# Altium PCB INDICATOR RIGHT.PcbDoc
Units mil, origin at the board's own origin, x right, y up, seen from the top; angles counter-clockwise.
Board outline 6151.76 x 2529.72 mil, 2 copper layers (Top Layer, Bottom Layer); 118 components, 87 nets, 286 pads, 24 vias.
Unrouted connection lines stored in the file: 76.
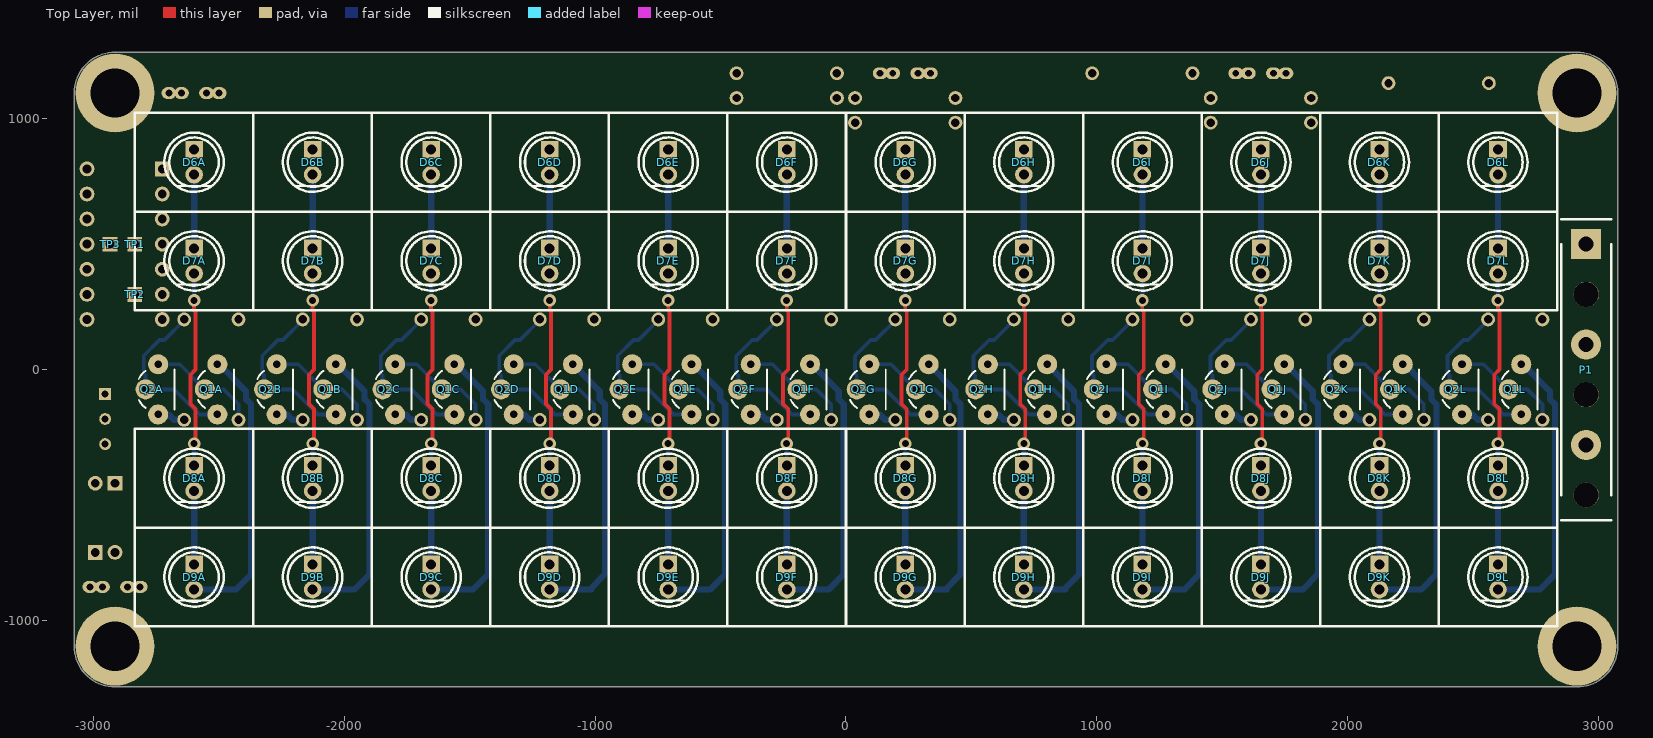
[diagram p0: Top Layer view]
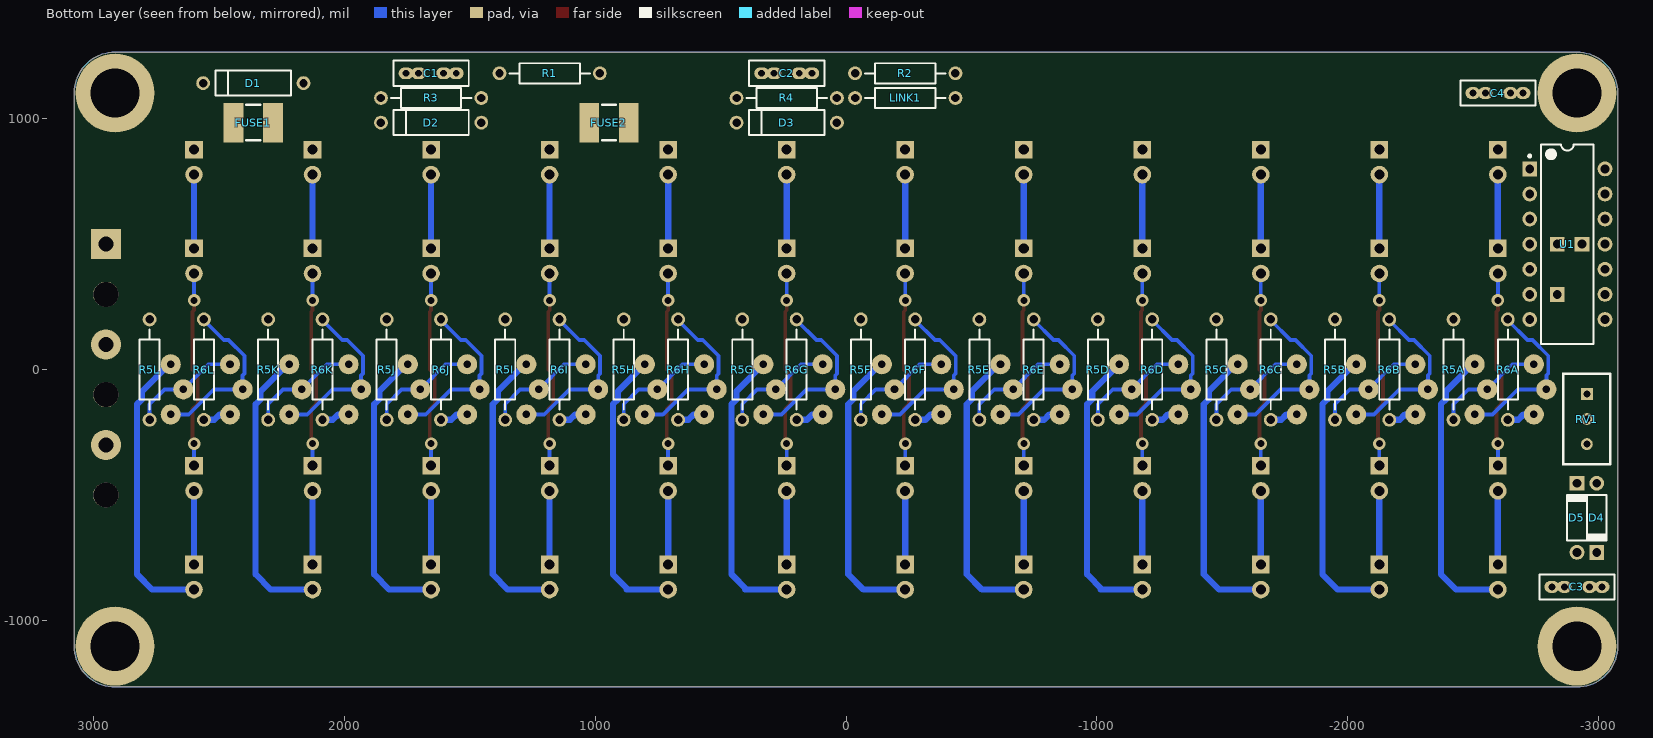
[diagram p1: Bottom Layer view, seen from below]
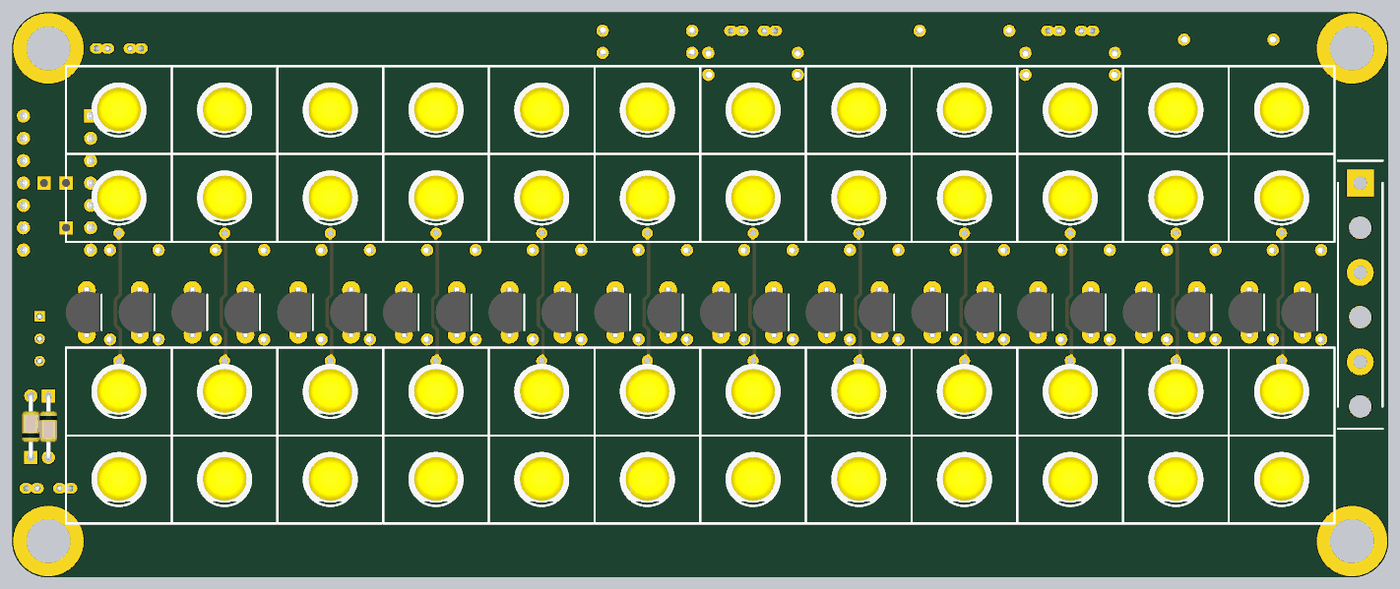
[diagram p2: 3D render of the assembled board from above, using the file's embedded part models]
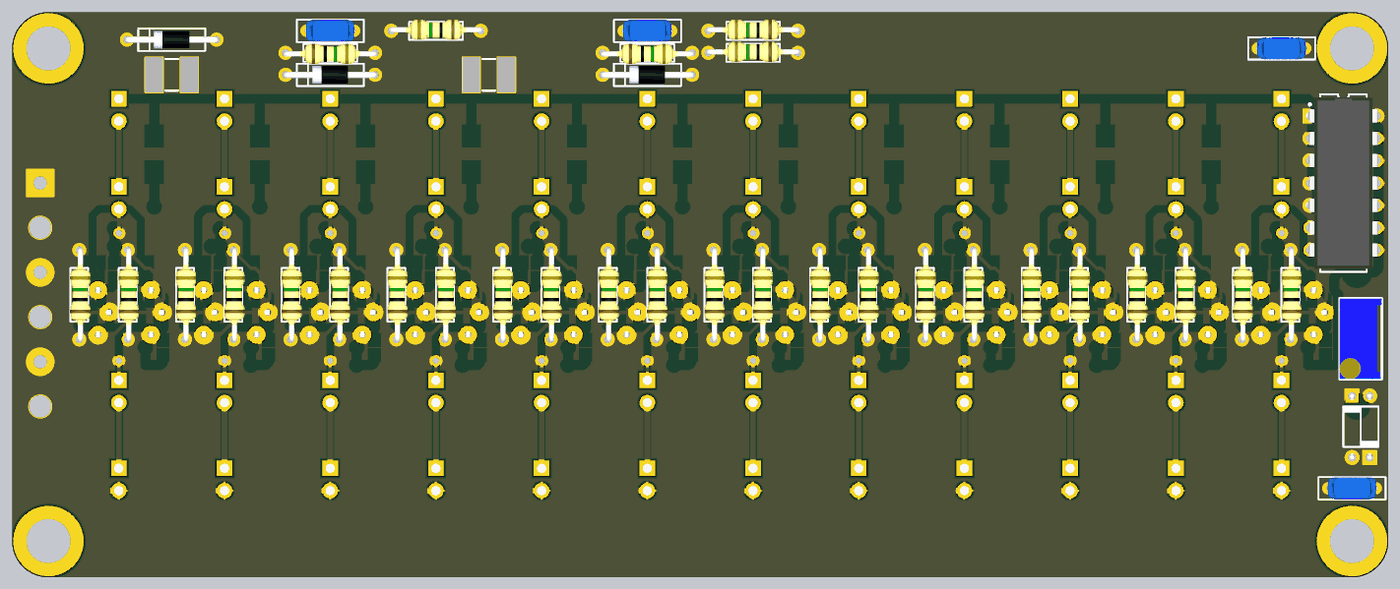
[diagram p3: 3D render of the assembled board from below, using the file's embedded part models]

## Layer stack, top to bottom
Top Layer: signal copper 1.4
Dielectric: dielectric 12.6, FR-4, Dk 4.8
Bottom Layer: signal copper 1.4

## Board outline
-3075.88,-1102.36 -3075.88,1102.36 cw(c-2913.39,1102.36) -2913.39,1264.86 2913.39,1264.86 cw(c2913.39,1102.36) 3075.88,1102.36 3075.88,-1102.36 cw(c2913.39,-1102.36) 2913.39,-1264.86 -2913.39,-1264.86 cw(c-2913.39,-1102.36)

## Design rules (kind name [scope] priority, off if disabled: settings)
Clearance [All] p1: gap=10
PolygonConnect [All] p1: connectstyle=Relief reliefconductorwidth=10 reliefentries=4 polygonreliefangle="90 Angle" airgapwidth=10
RoomDefinition INDICATOR [InComponentClass('INDICATOR')] p1: confinementstyle=ConfineIn formatcopy=TRUE lockcomponents=FALSE outline -3070.87,-1259.84 3070.87,-1259.84 3070.87,1259.84 -3070.87,1259.84
RoomDefinition U_LEDSANDDRIVER12 [InComponentClass('U_LEDSANDDRIVER12')] p2: confinementstyle=ConfineIn formatcopy=TRUE lockcomponents=FALSE outline 2362.2,-1023.62 2834.65,-1023.62 2834.65,1023.62 2362.2,1023.62
RoomDefinition U_LEDSANDDRIVER11 [InComponentClass('U_LEDSANDDRIVER11')] p3: confinementstyle=ConfineIn formatcopy=TRUE lockcomponents=FALSE outline 1889.76,-1023.62 2362.2,-1023.62 2362.2,1023.62 1889.76,1023.62
RoomDefinition U_LEDSANDDRIVER10 [InComponentClass('U_LEDSANDDRIVER10')] p4: confinementstyle=ConfineIn formatcopy=TRUE lockcomponents=FALSE outline 1417.32,-1023.62 1889.76,-1023.62 1889.76,1023.62 1417.32,1023.62
RoomDefinition U_LEDSANDDRIVER9 [InComponentClass('U_LEDSANDDRIVER9')] p5: confinementstyle=ConfineIn formatcopy=TRUE lockcomponents=FALSE outline 944.88,-1023.62 1417.32,-1023.62 1417.32,1023.62 944.88,1023.62
RoomDefinition U_LEDSANDDRIVER8 [InComponentClass('U_LEDSANDDRIVER8')] p6: confinementstyle=ConfineIn formatcopy=TRUE lockcomponents=FALSE outline 472.44,-1023.62 944.88,-1023.62 944.88,1023.62 472.44,1023.62
RoomDefinition U_LEDSANDDRIVER7 [InComponentClass('U_LEDSANDDRIVER7')] p7: confinementstyle=ConfineIn formatcopy=TRUE lockcomponents=FALSE outline 0,-1023.62 472.44,-1023.62 472.44,1023.62 0,1023.62
RoomDefinition U_LEDSANDDRIVER6 [InComponentClass('U_LEDSANDDRIVER6')] p8: confinementstyle=ConfineIn formatcopy=TRUE lockcomponents=FALSE outline -472.44,-1023.62 0,-1023.62 0,1023.62 -472.44,1023.62
RoomDefinition U_LEDSANDDRIVER5 [InComponentClass('U_LEDSANDDRIVER5')] p9: confinementstyle=ConfineIn formatcopy=TRUE lockcomponents=FALSE outline -944.88,-1023.62 -472.44,-1023.62 -472.44,1023.62 -944.88,1023.62
RoomDefinition U_LEDSANDDRIVER4 [InComponentClass('U_LEDSANDDRIVER4')] p10: confinementstyle=ConfineIn formatcopy=TRUE lockcomponents=FALSE outline -1417.32,-1023.62 -944.88,-1023.62 -944.88,1023.62 -1417.32,1023.62
RoomDefinition U_LEDSANDDRIVER3 [InComponentClass('U_LEDSANDDRIVER3')] p11: confinementstyle=ConfineIn formatcopy=TRUE lockcomponents=FALSE outline -1889.76,-1023.62 -1417.32,-1023.62 -1417.32,1023.62 -1889.76,1023.62
RoomDefinition U_LEDSANDDRIVER2 [InComponentClass('U_LEDSANDDRIVER2')] p12: confinementstyle=ConfineIn formatcopy=TRUE lockcomponents=FALSE outline -2362.2,-1023.62 -1889.76,-1023.62 -1889.76,1023.62 -2362.2,1023.62
RoomDefinition U_LEDSANDDRIVER1 [InComponentClass('U_LEDSANDDRIVER1')] p13: confinementstyle=ConfineIn formatcopy=TRUE lockcomponents=FALSE outline -2834.65,-1023.62 -2362.2,-1023.62 -2362.2,1023.62 -2834.65,1023.62
RoutingVias [All] p1: holewidth=28 width=50 viastyle="Through Hole" minholewidth=28 minwidth=50 maxholewidth=28 maxwidth=50
SolderMaskExpansion [All] p1: expansion=4
Width [All] p1: maxlimit=100 minlimit=10 preferedwidth=10
28 further rules are at their usual default settings.

## Classes and differential pairs
component class INDICATOR: C1 C2 C3 C4 D1 D2 D3 D4 D5 FUSE1 FUSE2 LINK1 P1 R1 R2 R3 R4 RV1 TP1 TP2 TP3 U1
component class U_LEDSANDDRIVER1: D6A D7A D8A D9A Q1A Q2A R5A R6A
component class U_LEDSANDDRIVER2: D6B D7B D8B D9B Q1B Q2B R5B R6B
component class U_LEDSANDDRIVER3: D6C D7C D8C D9C Q1C Q2C R5C R6C
component class U_LEDSANDDRIVER4: D6D D7D D8D D9D Q1D Q2D R5D R6D
component class U_LEDSANDDRIVER5: D6E D7E D8E D9E Q1E Q2E R5E R6E
component class U_LEDSANDDRIVER6: D6F D7F D8F D9F Q1F Q2F R5F R6F
component class U_LEDSANDDRIVER7: D6G D7G D8G D9G Q1G Q2G R5G R6G
component class U_LEDSANDDRIVER8: D6H D7H D8H D9H Q1H Q2H R5H R6H
component class U_LEDSANDDRIVER9: D6I D7I D8I D9I Q1I Q2I R5I R6I
component class U_LEDSANDDRIVER10: D6J D7J D8J D9J Q1J Q2J R5J R6J
component class U_LEDSANDDRIVER11: D6K D7K D8K D9K Q1K Q2K R5K R6K
component class U_LEDSANDDRIVER12: D6L D7L D8L D9L Q1L Q2L R5L R6L
channel class "LEDS AND DRIVER": U_LEDSANDDRIVER1 U_LEDSANDDRIVER2 U_LEDSANDDRIVER3 U_LEDSANDDRIVER4 U_LEDSANDDRIVER5 U_LEDSANDDRIVER6 U_LEDSANDDRIVER7 U_LEDSANDDRIVER8 U_LEDSANDDRIVER9 U_LEDSANDDRIVER10 U_LEDSANDDRIVER11 U_LEDSANDDRIVER12

## Components (designator, comment, footprint, x,y, rotation, side; value= is the part's Value field where it differs from the comment)
C1 "100nF" RAD-0.2-0.3 1653.54,1181.1 r0 bottom
C2 "100nF" RAD-0.2-0.3 236.22,1181.1 r0 bottom
C3 "100nF" RAD-0.2-0.3 -2913.39,-866.14 r180 bottom
C4 "100nF" RAD-0.2-0.3 -2598.43,1102.36 r180 bottom
D1 "1N4001" 1N4001 2362.2,1141.73 r180 bottom
D2 "12V" 1N4001 1653.54,984.25 r180 bottom
D3 "12V" 1N4001 236.22,984.25 r180 bottom
D4 "1N914" DO-35A -2992.13,-590.55 r270 bottom
D5 "1N914" DO-35A -2913.39,-590.55 r90 bottom
D6A "Value" "LED(3D) 5MM VERTICAL (YELLOW)" -2598.43,826.77 r90 top (schematic designator D6)
D6B "Value" "LED(3D) 5MM VERTICAL (YELLOW)" -2125.98,826.77 r90 top (schematic designator D6)
D6C "Value" "LED(3D) 5MM VERTICAL (YELLOW)" -1653.54,826.77 r90 top (schematic designator D6)
D6D "Value" "LED(3D) 5MM VERTICAL (YELLOW)" -1181.1,826.77 r90 top (schematic designator D6)
D6E "Value" "LED(3D) 5MM VERTICAL (YELLOW)" -708.66,826.77 r90 top (schematic designator D6)
D6F "Value" "LED(3D) 5MM VERTICAL (YELLOW)" -236.22,826.77 r90 top (schematic designator D6)
D6G "Value" "LED(3D) 5MM VERTICAL (YELLOW)" 236.22,826.77 r90 top (schematic designator D6)
D6H "Value" "LED(3D) 5MM VERTICAL (YELLOW)" 708.66,826.77 r90 top (schematic designator D6)
D6I "Value" "LED(3D) 5MM VERTICAL (YELLOW)" 1181.1,826.77 r90 top (schematic designator D6)
D6J "Value" "LED(3D) 5MM VERTICAL (YELLOW)" 1653.54,826.77 r90 top (schematic designator D6)
D6K "Value" "LED(3D) 5MM VERTICAL (YELLOW)" 2125.98,826.77 r90 top (schematic designator D6)
D6L "Value" "LED(3D) 5MM VERTICAL (YELLOW)" 2598.43,826.77 r90 top (schematic designator D6)
D7A "Value" "LED(3D) 5MM VERTICAL (YELLOW)" -2598.43,433.07 r90 top (schematic designator D7)
D7B "Value" "LED(3D) 5MM VERTICAL (YELLOW)" -2125.98,433.07 r90 top (schematic designator D7)
D7C "Value" "LED(3D) 5MM VERTICAL (YELLOW)" -1653.54,433.07 r90 top (schematic designator D7)
D7D "Value" "LED(3D) 5MM VERTICAL (YELLOW)" -1181.1,433.07 r90 top (schematic designator D7)
D7E "Value" "LED(3D) 5MM VERTICAL (YELLOW)" -708.66,433.07 r90 top (schematic designator D7)
D7F "Value" "LED(3D) 5MM VERTICAL (YELLOW)" -236.22,433.07 r90 top (schematic designator D7)
D7G "Value" "LED(3D) 5MM VERTICAL (YELLOW)" 236.22,433.07 r90 top (schematic designator D7)
D7H "Value" "LED(3D) 5MM VERTICAL (YELLOW)" 708.66,433.07 r90 top (schematic designator D7)
D7I "Value" "LED(3D) 5MM VERTICAL (YELLOW)" 1181.1,433.07 r90 top (schematic designator D7)
D7J "Value" "LED(3D) 5MM VERTICAL (YELLOW)" 1653.54,433.07 r90 top (schematic designator D7)
D7K "Value" "LED(3D) 5MM VERTICAL (YELLOW)" 2125.98,433.07 r90 top (schematic designator D7)
D7L "Value" "LED(3D) 5MM VERTICAL (YELLOW)" 2598.43,433.07 r90 top (schematic designator D7)
D8A "Value" "LED(3D) 5MM VERTICAL (YELLOW)" -2598.43,-433.07 r90 top (schematic designator D8)
D8B "Value" "LED(3D) 5MM VERTICAL (YELLOW)" -2125.98,-433.07 r90 top (schematic designator D8)
D8C "Value" "LED(3D) 5MM VERTICAL (YELLOW)" -1653.54,-433.07 r90 top (schematic designator D8)
D8D "Value" "LED(3D) 5MM VERTICAL (YELLOW)" -1181.1,-433.07 r90 top (schematic designator D8)
D8E "Value" "LED(3D) 5MM VERTICAL (YELLOW)" -708.66,-433.07 r90 top (schematic designator D8)
D8F "Value" "LED(3D) 5MM VERTICAL (YELLOW)" -236.22,-433.07 r90 top (schematic designator D8)
D8G "Value" "LED(3D) 5MM VERTICAL (YELLOW)" 236.22,-433.07 r90 top (schematic designator D8)
D8H "Value" "LED(3D) 5MM VERTICAL (YELLOW)" 708.66,-433.07 r90 top (schematic designator D8)
D8I "Value" "LED(3D) 5MM VERTICAL (YELLOW)" 1181.1,-433.07 r90 top (schematic designator D8)
D8J "Value" "LED(3D) 5MM VERTICAL (YELLOW)" 1653.54,-433.07 r90 top (schematic designator D8)
D8K "Value" "LED(3D) 5MM VERTICAL (YELLOW)" 2125.98,-433.07 r90 top (schematic designator D8)
D8L "Value" "LED(3D) 5MM VERTICAL (YELLOW)" 2598.43,-433.07 r90 top (schematic designator D8)
D9A "Value" "LED(3D) 5MM VERTICAL (YELLOW)" -2598.43,-826.77 r90 top (schematic designator D9)
D9B "Value" "LED(3D) 5MM VERTICAL (YELLOW)" -2125.98,-826.77 r90 top (schematic designator D9)
D9C "Value" "LED(3D) 5MM VERTICAL (YELLOW)" -1653.54,-826.77 r90 top (schematic designator D9)
D9D "Value" "LED(3D) 5MM VERTICAL (YELLOW)" -1181.1,-826.77 r90 top (schematic designator D9)
D9E "Value" "LED(3D) 5MM VERTICAL (YELLOW)" -708.66,-826.77 r90 top (schematic designator D9)
D9F "Value" "LED(3D) 5MM VERTICAL (YELLOW)" -236.22,-826.77 r90 top (schematic designator D9)
D9G "Value" "LED(3D) 5MM VERTICAL (YELLOW)" 236.22,-826.77 r90 top (schematic designator D9)
D9H "Value" "LED(3D) 5MM VERTICAL (YELLOW)" 708.66,-826.77 r90 top (schematic designator D9)
D9I "Value" "LED(3D) 5MM VERTICAL (YELLOW)" 1181.1,-826.77 r90 top (schematic designator D9)
D9J "Value" "LED(3D) 5MM VERTICAL (YELLOW)" 1653.54,-826.77 r90 top (schematic designator D9)
D9K "Value" "LED(3D) 5MM VERTICAL (YELLOW)" 2125.98,-826.77 r90 top (schematic designator D9)
D9L "Value" "LED(3D) 5MM VERTICAL (YELLOW)" 2598.43,-826.77 r90 top (schematic designator D9)
FUSE1 "500mA" "miniSMD Polyswitch" 2362.2,984.25 r180 bottom
FUSE2 "500mA" "miniSMD Polyswitch" 944.88,984.25 r180 bottom
LINK1 "Res2" AXIAL-0.4 -236.22,1082.68 r0 bottom
P1 "Header 3" TAIL 3050,0 r270 top
Q1A "PN100" TO-92 -2500,-78.74 r0 top (schematic designator Q1)
Q1B "PN100" TO-92 -2027.55,-78.74 r0 top (schematic designator Q1)
Q1C "PN100" TO-92 -1555.11,-78.74 r0 top (schematic designator Q1)
Q1D "PN100" TO-92 -1082.67,-78.74 r0 top (schematic designator Q1)
Q1E "PN100" TO-92 -610.23,-78.74 r0 top (schematic designator Q1)
Q1F "PN100" TO-92 -137.79,-78.74 r0 top (schematic designator Q1)
Q1G "PN100" TO-92 334.65,-78.74 r0 top (schematic designator Q1)
Q1H "PN100" TO-92 807.09,-78.74 r0 top (schematic designator Q1)
Q1I "PN100" TO-92 1279.53,-78.74 r0 top (schematic designator Q1)
Q1J "PN100" TO-92 1751.97,-78.74 r0 top (schematic designator Q1)
Q1K "PN100" TO-92 2224.41,-78.74 r0 top (schematic designator Q1)
Q1L "PN100" TO-92 2696.85,-78.74 r0 top (schematic designator Q1)
Q2A "PN100" TO-92 -2736.22,-78.74 r0 top (schematic designator Q2)
Q2B "PN100" TO-92 -2263.78,-78.74 r0 top (schematic designator Q2)
Q2C "PN100" TO-92 -1791.33,-78.74 r0 top (schematic designator Q2)
Q2D "PN100" TO-92 -1318.89,-78.74 r0 top (schematic designator Q2)
Q2E "PN100" TO-92 -846.45,-78.74 r0 top (schematic designator Q2)
Q2F "PN100" TO-92 -374.01,-78.74 r0 top (schematic designator Q2)
Q2G "PN100" TO-92 98.43,-78.74 r0 top (schematic designator Q2)
Q2H "PN100" TO-92 570.87,-78.74 r0 top (schematic designator Q2)
Q2I "PN100" TO-92 1043.31,-78.74 r0 top (schematic designator Q2)
Q2J "PN100" TO-92 1515.75,-78.74 r0 top (schematic designator Q2)
Q2K "PN100" TO-92 1988.19,-78.74 r0 top (schematic designator Q2)
Q2L "PN100" TO-92 2460.63,-78.74 r0 top (schematic designator Q2)
R1 "Res2" AXIAL-0.4 1181.1,1181.1 r0 bottom
R2 "Res2" AXIAL-0.4 -236.22,1181.1 r0 bottom
R3 "Res2" AXIAL-0.4 1653.54,1082.68 r180 bottom
R4 "Res2" AXIAL-0.4 236.22,1082.68 r180 bottom
R5A "1k" AXIAL-0.4 -2421.26,0 r90 bottom (schematic designator R5)
R5B "1k" AXIAL-0.4 -1948.82,0 r90 bottom (schematic designator R5)
R5C "1k" AXIAL-0.4 -1476.38,0 r90 bottom (schematic designator R5)
R5D "1k" AXIAL-0.4 -1003.94,0 r90 bottom (schematic designator R5)
R5E "1k" AXIAL-0.4 -531.5,0 r90 bottom (schematic designator R5)
R5F "1k" AXIAL-0.4 -59.05,0 r90 bottom (schematic designator R5)
R5G "1k" AXIAL-0.4 413.39,0 r90 bottom (schematic designator R5)
R5H "1k" AXIAL-0.4 885.83,0 r90 bottom (schematic designator R5)
R5I "1k" AXIAL-0.4 1358.27,0 r90 bottom (schematic designator R5)
R5J "1k" AXIAL-0.4 1830.71,0 r90 bottom (schematic designator R5)
R5K "1k" AXIAL-0.4 2303.15,0 r90 bottom (schematic designator R5)
R5L "1k" AXIAL-0.4 2775.59,0 r90 bottom (schematic designator R5)
R6A "35R" AXIAL-0.4 -2637.8,0 r90 bottom (schematic designator R6)
R6B "35R" AXIAL-0.4 -2165.35,0 r90 bottom (schematic designator R6)
R6C "35R" AXIAL-0.4 -1692.91,0 r90 bottom (schematic designator R6)
R6D "35R" AXIAL-0.4 -1220.47,0 r90 bottom (schematic designator R6)
R6E "35R" AXIAL-0.4 -748.03,0 r90 bottom (schematic designator R6)
R6F "35R" AXIAL-0.4 -275.59,0 r90 bottom (schematic designator R6)
R6G "35R" AXIAL-0.4 196.85,0 r90 bottom (schematic designator R6)
R6H "35R" AXIAL-0.4 669.29,0 r90 bottom (schematic designator R6)
R6I "35R" AXIAL-0.4 1141.73,0 r90 bottom (schematic designator R6)
R6J "35R" AXIAL-0.4 1614.17,0 r90 bottom (schematic designator R6)
R6K "35R" AXIAL-0.4 2086.61,0 r90 bottom (schematic designator R6)
R6L "35R" AXIAL-0.4 2559.06,0 r90 bottom (schematic designator R6)
RV1 "10k" "TRIMPOT (10 TURN)" -2952.76,-196.85 r270 bottom
TP1 "TestPoint" TP_TH -2834.65,500 r0 top
TP2 "TestPoint" TP_TH -2834.65,300 r90 top
TP3 "TestPoint" TP_TH -2933.07,500 r90 top
U1 "CD4011" DIP-14 -2875,500 r180 bottom

## Footprints (in the part's own frame and the unit in brackets; to place one, negate y for a bottom-side part, rotate by r counter-clockwise, add the part's x,y. Pads: shape width x height; smd on the part's side, far side on the other; paste and mask are expansions set on the pad)
1N4001 [mm] "Axial Device, Thru-Hole; 2 Leads; 0.5 in Pin Spacing"
  round 1.4 hole 0.85: 1(5.08,0) 2(-5.08,0)
  silkscreen extent -3.81,-1.27 3.81,1.27, body extent -5.35,-1.01 5.36,1.01, height 2.28
AXIAL-0.4 [mm] "Axial Device, Thru-Hole; 2 Leads; 0.4 in Pin Spacing"
  round 1.4 hole 0.85: 1(-5.08,0) 2(5.08,0)
  silkscreen extent -4.06,-1.02 4.06,1.02, body extent -5.38,-1.27 5.38,1.04, height 2.54
DIP-14 [mm] "DIP; 14 Leads; Row Spacing 7.62 mm; Pitch 2.54 mm"
  rect 1.5x1.5 hole 0.9: 1(-3.81,7.62)
  round 1.5 hole 0.9: 2(-3.81,5.08) 3(-3.81,2.54) 4(-3.81,0) 5(-3.81,-2.54) 6(-3.81,-5.08) 7(-3.81,-7.62) 8(3.81,-7.62) 9(3.81,-5.08) 10(3.81,-2.54) 11(3.81,0) 12(3.81,2.54) 13(3.81,5.08) 14(3.81,7.62)
  silkscreen extent -3.94,-10.1 2.65,10.1, body extent -3.94,-9.75 3.93,9.75, height 5.08
DO-35A [mm] "Diode, Axial; Body 4.6 x 1.9 mm (LxDia. max), Lead Dia. 0.53 mm (max)"
  round 1.5 hole 0.9: 1(-3.5,0)
  rect 1.5x1.5 hole 0.9: 2(3.5,0)
  silkscreen extent -2.3,-1 2.4,1, body extent -3.75,-1 3.75,1, height 2
"LED(3D) 5MM VERTICAL (YELLOW)" [mil]
  rect 70x70 hole 40: 1(50.06,-0.28)
  round 70 hole 40: 2(-49.94,-0.28)
  silkscreen extent -95,-118 118,118, body extent -96,-119 117,118, height 485
"miniSMD Polyswitch" [mm] "RAYCHEM - MINISMDC050F-2"
  rect 2x4 smd: 1(-2,0) 2(2,0)
  silkscreen extent -0.7,-1.8 0.7,1.8, body extent -2.4,-1.7 2.4,1.7, height 0.62
RAD-0.2-0.3 [mm] "Radial Cap, Thru-Hole; 2 Leads; 0.2 in Pin Spacing"
  oval 1.5x1.2 hole 0.7: 1(-2.54,0) 1(-1.27,0) 2(1.27,0) 2(2.54,0)
  silkscreen extent -3.81,-1.27 3.81,1.27, body extent -2.75,-1.25 2.75,1.25, height 5.5
TAIL [mil] "Connector; Header; 3 Position"
  rect 120x120 hole 60: 1(-500,-100)
  round 120 hole 60: 2(-100,-100) 3(300,-100)
  round 100 hole 100: H1(-300,-100) H2(100,-100) H3(500,-100)
  silkscreen extent -600,-200 600,0
TO-92 [mil] "TO, Flat Index; 3 In-Line, Axial Leads; Body Dia. 4.6mm; Leads 0.41 x 0.39 mm (max)"
  round 80 hole 30: 1(-5.52,-100.01) 2(-55.52,-0.01) 3(-5.52,99.99)
  silkscreen extent -83,-80 60,80, body extent -100,-112 50,112, height 289
TP_TH [mm]
  rect 1.5x1.5 hole 0.9: 1(0,0)
"TRIMPOT (10 TURN)" [mm] "Thru-Hole; 3 Leads"
  rect 1.2x1.2 hole 0.7: 1(-2.54,0)
  round 1.2 hole 0.7: 2(0,0) 3(2.54,0)
  silkscreen extent -4.6,-2.41 4.6,2.39, body extent -4.6,-2.41 4.6,2.39, height 12.02

## Part data
C1 C2 C3 C4: library part Cap, "Capacitor"
D1: library part DIODE, "DIODE, POWER"
D2 D3: library part "D Zener", "ZENER 12V 1W"
D4 D5: library part "Diode 1N914", "High Conductance Fast Diode"
D6A D6B D6C D6D D6E D6F D6G D6H D6I D6J D6K D6L D7A D7B D7C D7D D7E D7F D7G D7H D7I D7J D7K D7L D8A D8B D8C D8D D8E D8F D8G D8H D8I D8J D8K D8L D9A D9B D9C D9D D9E D9F D9G D9H D9I D9J D9K D9L: library part "LED 3mm RED", "LED 55"
FUSE1 FUSE2: library part "POLYSWITCH 500mA", "POLYSWITCH 500mA"
LINK1 R1 R2 R3 R4: "Resistor"
P1: "Header, 3-Pin"
Q1A Q1B Q1C Q1D Q1E Q1F Q1G Q1H Q1I Q1J Q1K Q1L Q2A Q2B Q2C Q2D Q2E Q2F Q2G Q2H Q2I Q2J Q2K Q2L: "NPN Bipolar Transistor"
R5A R5B R5C R5D R5E R5F R5G R5H R5I R5J R5K R5L R6A R6B R6C R6D R6E R6F R6G R6H R6I R6J R6K R6L: library part "RES SMD 0603 1k", "RESISTOR SMD 0603 1k"
RV1: library part "VAR (POT) SMD", "Variable Resistor"
U1: "Quadruple 2-Input Positive-NAND Gate"

## Free pads (board coordinates)
  round 314.96 hole 196.85: 0(-2913.39,-1102.36) 0(-2913.39,1102.36) 0(2913.39,-1102.36) 0(2913.39,1102.36)

## Via types
v1: diameter 50, hole 28, Top Layer to Bottom Layer, 24 vias

## Nets (pads, with @x,y where several pads share a name; then routed paths per layer and width w, separated by ;. In a path a pad name is that pad's centre, name@x,y a point inside that pad or via, vN(x,y) a via of type N, cw(c..) or ccw(c..) an arc to the next point about the centre after c; other vN are vias at no path point)
BRIGHT: FUSE1.1 P1.1
DIM: FUSE2.1 P1.2
DRIVE: R5A.2 R5B.2 R5C.2 R5D.2 R5E.2 R5F.2 R5G.2 R5H.2 R5I.2 R5J.2 R5K.2 R5L.2 TP1.1 U1.4
GND: C1.1 C2.1 C3.1 C4.1 D2.1 D3.1 P1.3 Q2A.1 Q2B.1 Q2C.1 Q2D.1 Q2E.1 Q2F.1 Q2G.1 Q2H.1 Q2I.1 Q2J.1 Q2K.1 Q2L.1 R3.2 R4.2 R6A.1 R6B.1 R6C.1 R6D.1 R6E.1 R6F.1 R6G.1 R6H.1 R6I.1 R6J.1 R6K.1 R6L.1 | length 1352.9
  Bottom Layer w25: Q2A.1 -2700.39,-178.75 -2679.14,-200 R6A.1 ; Q2B.1 -2227.95,-178.75 -2206.7,-200 R6B.1 ; Q2C.1 -1755.51,-178.75 -1734.26,-200 R6C.1 ; Q2D.1 -1283.07,-178.75 -1261.82,-200 R6D.1 ; Q2E.1 -810.63,-178.75 -789.38,-200 R6E.1 ; Q2F.1 -338.19,-178.75 -316.93,-200 R6F.1 ; Q2G.1 134.25,-178.75 155.51,-200 R6G.1 ; Q2H.1 606.69,-178.75 627.95,-200 R6H.1 ; Q2I.1@1037.79,-178.75 1079.13,-178.75 1100.39,-200 R6I.1 ; Q2J.1 1551.58,-178.75 1572.83,-200 R6J.1 ; Q2K.1 2024.02,-178.75 2045.27,-200 R6K.1 ; Q2L.1 2496.46,-178.75 2517.71,-200 R6L.1
NetC1_2: C1.2 D1.1 D2.2 FUSE1.2 R1.2 R3.1
NetC3_2: C3.2 D4.2 D5.1
NetD4_1: D4.1 RV1.1
NetD5_2: D5.2 RV1.3
NetD6A_1: D6A.1 D6B.1 D6C.1 D6D.1 D6E.1 D6F.1 D6G.1 D6H.1 D6I.1 D6J.1 D6K.1 D6L.1 LINK1.1
NetD6A_2: D6A.2 D7A.1 | length 293.7
  Bottom Layer w25: D7A.1 D6A.2
NetD6B_2: D6B.2 D7B.1 | length 293.7
  Bottom Layer w25: D7B.1 D6B.2
NetD6C_2: D6C.2 D7C.1 | length 293.7
  Bottom Layer w25: D7C.1 D6C.2
NetD6D_2: D6D.2 D7D.1 | length 293.7
  Bottom Layer w25: D7D.1 D6D.2
NetD6E_2: D6E.2 D7E.1 | length 293.7
  Bottom Layer w25: D7E.1 D6E.2
NetD6F_2: D6F.2 D7F.1 | length 293.7
  Bottom Layer w25: D7F.1 D6F.2
NetD6G_2: D6G.2 D7G.1 | length 293.7
  Bottom Layer w25: D7G.1 D6G.2
NetD6H_2: D6H.2 D7H.1 | length 293.7
  Bottom Layer w25: D7H.1 D6H.2
NetD6I_2: D6I.2 D7I.1 | length 293.7
  Bottom Layer w25: D7I.1 D6I.2
NetD6J_2: D6J.2 D7J.1 | length 293.7
  Bottom Layer w25: D7J.1 D6J.2
NetD6K_2: D6K.2 D7K.1 | length 293.7
  Bottom Layer w25: D7K.1 D6K.2
NetD6L_2: D6L.2 D7L.1 | length 293.7
  Bottom Layer w25: D7L.1 D6L.2
NetD7A_2: D7A.2 D8A.1 | length 787.9
  Top Layer w15: v1(-2598.43,-295.28) -2592.74,-289.59 -2592.74,-157.48 -2613.02,-137.2 -2613.02,-20.28 -2592.74,0 -2592.74,230.53 -2598.43,236.22 v1(-2598.43,275.59)
  Bottom Layer w15: v1(-2598.43,-295.28) -2598.14,-295.56 D8A.1 ; v1(-2598.43,275.59) -2598.14,275.88 D7A.2
NetD7B_2: D7B.2 D8B.1 | length 787.9
  Top Layer w15: v1(-2125.98,-295.28) -2120.3,-289.59 -2120.3,-157.48 -2140.58,-137.2 -2140.58,-20.28 -2120.3,0 -2120.3,230.53 -2125.98,236.22 v1(-2125.98,275.59)
  Bottom Layer w15: v1(-2125.98,-295.28) -2125.7,-295.56 D8B.1 ; v1(-2125.98,275.59) -2125.7,275.88 D7B.2
NetD7C_2: D7C.2 D8C.1 | length 787.9
  Top Layer w15: v1(-1653.54,-295.28) -1647.85,-289.59 -1647.85,-157.48 -1668.13,-137.2 -1668.13,-20.28 -1647.85,0 -1647.85,230.53 -1653.54,236.22 v1(-1653.54,275.59)
  Bottom Layer w15: v1(-1653.54,-295.28) -1653.26,-295.56 D8C.1 ; v1(-1653.54,275.59) -1653.26,275.88 D7C.2
NetD7D_2: D7D.2 D8D.1 | length 787.9
  Top Layer w15: v1(-1181.1,-295.28) -1175.41,-289.59 -1175.41,-157.48 -1195.69,-137.2 -1195.69,-20.28 -1175.41,0 -1175.41,230.53 -1181.1,236.22 v1(-1181.1,275.59)
  Bottom Layer w15: v1(-1181.1,-295.28) -1180.82,-295.56 D8D.1 ; v1(-1181.1,275.59) -1180.82,275.88 D7D.2
NetD7E_2: D7E.2 D8E.1 | length 787.9
  Top Layer w15: v1(-708.66,-295.28) -702.97,-289.59 -702.97,-157.48 -723.25,-137.2 -723.25,-20.28 -702.97,0 -702.97,230.53 -708.66,236.22 v1(-708.66,275.59)
  Bottom Layer w15: v1(-708.66,-295.28) -708.38,-295.56 D8E.1 ; v1(-708.66,275.59) -708.38,275.88 D7E.2
NetD7F_2: D7F.2 D8F.1 | length 787.9
  Top Layer w15: v1(-236.22,-295.28) -230.53,-289.59 -230.53,-157.48 -250.81,-137.2 -250.81,-20.28 -230.53,0 -230.53,230.53 -236.22,236.22 v1(-236.22,275.59)
  Bottom Layer w15: v1(-236.22,-295.28) -235.94,-295.56 D8F.1 ; v1(-236.22,275.59) -235.94,275.88 D7F.2
NetD7G_2: D7G.2 D8G.1 | length 787.9
  Top Layer w15: v1(236.22,-295.28) 241.91,-289.59 241.91,-157.48 221.63,-137.2 221.63,-20.28 241.91,0 241.91,230.53 236.22,236.22 v1(236.22,275.59)
  Bottom Layer w15: v1(236.22,-295.28) 236.51,-295.56 D8G.1 ; v1(236.22,275.59) 236.51,275.88 D7G.2
NetD7H_2: D7H.2 D8H.1 | length 787.9
  Top Layer w15: v1(708.66,-295.28) 714.35,-289.59 714.35,-157.48 694.07,-137.2 694.07,-20.28 714.35,0 714.35,230.53 708.66,236.22 v1(708.66,275.59)
  Bottom Layer w15: v1(708.66,-295.28) 708.95,-295.56 D8H.1 ; v1(708.66,275.59) 708.95,275.88 D7H.2
NetD7I_2: D7I.2 D8I.1 | length 787.9
  Top Layer w15: v1(1181.1,-295.28) 1186.79,-289.59 1186.79,-157.48 1166.51,-137.2 1166.51,-20.28 1186.79,0 1186.79,230.53 1181.1,236.22 v1(1181.1,275.59)
  Bottom Layer w15: v1(1181.1,-295.28) 1181.39,-295.56 D8I.1 ; v1(1181.1,275.59) 1181.39,275.88 D7I.2
NetD7J_2: D7J.2 D8J.1 | length 787.9
  Top Layer w15: v1(1653.54,-295.28) 1659.23,-289.59 1659.23,-157.48 1638.95,-137.2 1638.95,-20.28 1659.23,0 1659.23,230.53 1653.54,236.22 v1(1653.54,275.59)
  Bottom Layer w15: v1(1653.54,-295.28) 1653.83,-295.56 D8J.1 ; v1(1653.54,275.59) 1653.83,275.88 D7J.2
NetD7K_2: D7K.2 D8K.1 | length 787.9
  Top Layer w15: v1(2125.98,-295.28) 2131.67,-289.59 2131.67,-157.48 2111.39,-137.2 2111.39,-20.28 2131.67,0 2131.67,230.53 2125.98,236.22 v1(2125.98,275.59)
  Bottom Layer w15: v1(2125.98,-295.28) 2126.27,-295.56 D8K.1 ; v1(2125.98,275.59) 2126.27,275.88 D7K.2
NetD7L_2: D7L.2 D8L.1 | length 787.9
  Top Layer w15: v1(2598.43,-295.28) 2604.11,-289.59 2604.11,-157.48 2583.83,-137.2 2583.83,-20.28 2604.11,0 2604.11,230.53 2598.43,236.22 v1(2598.43,275.59)
  Bottom Layer w15: v1(2598.43,-295.28) 2598.71,-295.56 D8L.1 ; v1(2598.43,275.59) 2598.71,275.88 D7L.2
NetD8A_2: D8A.2 D9A.1 | length 293.7
  Bottom Layer w25: D9A.1 D8A.2
NetD8B_2: D8B.2 D9B.1 | length 293.7
  Bottom Layer w25: D9B.1 D8B.2
NetD8C_2: D8C.2 D9C.1 | length 293.7
  Bottom Layer w25: D9C.1 D8C.2
NetD8D_2: D8D.2 D9D.1 | length 293.7
  Bottom Layer w25: D9D.1 D8D.2
NetD8E_2: D8E.2 D9E.1 | length 293.7
  Bottom Layer w25: D9E.1 D8E.2
NetD8F_2: D8F.2 D9F.1 | length 293.7
  Bottom Layer w25: D9F.1 D8F.2
NetD8G_2: D8G.2 D9G.1 | length 293.7
  Bottom Layer w25: D9G.1 D8G.2
NetD8H_2: D8H.2 D9H.1 | length 293.7
  Bottom Layer w25: D9H.1 D8H.2
NetD8I_2: D8I.2 D9I.1 | length 293.7
  Bottom Layer w25: D9I.1 D8I.2
NetD8J_2: D8J.2 D9J.1 | length 293.7
  Bottom Layer w25: D9J.1 D8J.2
NetD8K_2: D8K.2 D9K.1 | length 293.7
  Bottom Layer w25: D9K.1 D8K.2
NetD8L_2: D8L.2 D9L.1 | length 293.7
  Bottom Layer w25: D9L.1 D8L.2
NetD9A_2: D9A.2 Q1A.3 | length 1149.1
  Bottom Layer w25: D9A.2 -2431.83,-876.71 -2371.2,-816.08 -2371.2,-138.17 -2391.26,-118.11 -2391.26,-86 -2498.51,21.25 Q1A.3
NetD9B_2: D9B.2 Q1B.3 | length 1149.1
  Bottom Layer w25: D9B.2 -1959.38,-876.71 -1898.76,-816.08 -1898.76,-138.17 -1918.81,-118.11 -1918.81,-86 -2026.07,21.25 Q1B.3
NetD9C_2: D9C.2 Q1C.3 | length 1149.1
  Bottom Layer w25: D9C.2 -1486.95,-876.71 -1426.31,-816.08 -1426.31,-138.17 -1446.37,-118.11 -1446.37,-86 -1553.63,21.25 Q1C.3
NetD9D_2: D9D.2 Q1D.3 | length 1156.1
  Bottom Layer w25: D9D.2@-1187.82,-876.71 D9D.2 -1021.51,-876.71 ; Q1D.3@-1095.19,21.25 Q1D.3 -980.94,-86 -980.94,-118.11 -960.88,-138.17 -960.88,-816.08 -1021.51,-876.71 ; -1014.51,-876.71 -1021.51,-876.71
NetD9E_2: D9E.2 Q1E.3 | length 1149.1
  Bottom Layer w25: D9E.2 -542.07,-876.71 -481.43,-816.08 -481.43,-138.17 -501.49,-118.11 -501.49,-86 -608.74,21.25 Q1E.3
NetD9F_2: D9F.2 Q1F.3 | length 1149.1
  Bottom Layer w25: D9F.2 -69.63,-876.71 -8.99,-816.08 -8.99,-138.17 -29.05,-118.11 -29.05,-86 -136.3,21.25 Q1F.3
NetD9G_2: D9G.2 Q1G.3 | length 1156.1
  Bottom Layer w25: D9G.2@229.5,-876.71 D9G.2 395.82,-876.71 ; Q1G.3@322.13,21.25 Q1G.3 436.39,-86 436.39,-118.11 456.44,-138.17 456.44,-816.08 395.82,-876.71 ; 402.82,-876.71 395.82,-876.71
NetD9H_2: D9H.2 Q1H.3 | length 1156.1
  Bottom Layer w25: D9H.2@701.95,-876.71 D9H.2 868.26,-876.71 ; Q1H.3@794.57,21.25 Q1H.3 908.83,-86 908.83,-118.11 928.89,-138.17 928.89,-816.08 868.26,-876.71 ; 875.26,-876.71 868.26,-876.71
NetD9I_2: D9I.2 Q1I.3 | length 1149.1
  Bottom Layer w25: D9I.2 1347.7,-876.71 1408.33,-816.08 1408.33,-138.17 1388.27,-118.11 1388.27,-86 1281.02,21.25 Q1I.3
NetD9J_2: D9J.2 Q1J.3 | length 1149.1
  Bottom Layer w25: D9J.2 1820.14,-876.71 1880.77,-816.08 1880.77,-138.17 1860.71,-118.11 1860.71,-86 1753.46,21.25 Q1J.3
NetD9K_2: D9K.2 Q1K.3 | length 1149.1
  Bottom Layer w25: D9K.2 2292.58,-876.71 2353.21,-816.08 2353.21,-138.17 2333.15,-118.11 2333.15,-86 2225.9,21.25 Q1K.3
NetD9L_2: D9L.2 Q1L.3 | length 1149.1
  Bottom Layer w25: D9L.2 2765.02,-876.71 2825.65,-816.08 2825.65,-138.17 2805.6,-118.11 2805.6,-86 2698.34,21.25 Q1L.3
NetQ1A_1: Q1A.1 Q2A.2 R6A.2 | length 687.9
  Bottom Layer w15: R6A.2 -2637.8,196.85 -2716.54,118.11 -2736.22,118.11 -2799.24,55.09 -2799.24,-15.72 -2791.74,-23.22 Q2A.2 -2677.16,-78.75 -2577.16,-178.75 Q1A.1
NetQ1A_2: Q1A.2 Q2A.3 R5A.1 | length 448.6
  Bottom Layer w15: Q2A.3 -2655.52,21.25 Q1A.2 -2480.31,-78.75 -2421.26,-137.8 R5A.1
NetQ1B_1: Q1B.1 Q2B.2 R6B.2 | length 687.9
  Bottom Layer w15: R6B.2 -2165.35,196.85 -2244.09,118.11 -2263.78,118.11 -2326.8,55.09 -2326.8,-15.72 -2319.3,-23.22 Q2B.2 -2204.72,-78.75 -2104.72,-178.75 Q1B.1
NetQ1B_2: Q1B.2 Q2B.3 R5B.1 | length 448.6
  Bottom Layer w15: Q2B.3 -2183.08,21.25 Q1B.2 -2007.87,-78.75 -1948.82,-137.8 R5B.1
NetQ1C_1: Q1C.1 Q2C.2 R6C.2 | length 687.9
  Bottom Layer w15: R6C.2 -1692.91,196.85 -1771.65,118.11 -1791.34,118.11 -1854.36,55.09 -1854.36,-15.72 -1846.86,-23.22 Q2C.2 -1732.28,-78.75 -1632.28,-178.75 Q1C.1
NetQ1C_2: Q1C.2 Q2C.3 R5C.1 | length 448.6
  Bottom Layer w15: Q2C.3 -1710.63,21.25 Q1C.2 -1535.43,-78.75 -1476.38,-137.8 R5C.1
NetQ1D_1: Q1D.1 Q2D.2 R6D.2 | length 687.9
  Bottom Layer w15: R6D.2 -1220.47,196.85 -1299.21,118.11 -1318.9,118.11 -1381.91,55.09 -1381.91,-15.72 -1374.41,-23.22 Q2D.2 -1259.84,-78.75 -1159.84,-178.75 Q1D.1
NetQ1D_2: Q1D.2 Q2D.3 R5D.1 | length 448.6
  Bottom Layer w15: Q2D.3 -1238.19,21.25 Q1D.2 -1062.99,-78.75 -1003.94,-137.8 R5D.1
NetQ1E_1: Q1E.1 Q2E.2 R6E.2 | length 687.9
  Bottom Layer w15: R6E.2 -748.03,196.85 -826.77,118.11 -846.46,118.11 -909.47,55.09 -909.47,-15.72 -901.97,-23.22 Q2E.2 -787.4,-78.75 -687.4,-178.75 Q1E.1
NetQ1E_2: Q1E.2 Q2E.3 R5E.1 | length 448.6
  Bottom Layer w15: Q2E.3 -765.75,21.25 Q1E.2 -590.54,-78.75 -531.5,-137.8 R5E.1
NetQ1F_1: Q1F.1 Q2F.2 R6F.2 | length 687.9
  Bottom Layer w15: R6F.2 -275.59,196.85 -354.33,118.11 -374.02,118.11 -437.03,55.09 -437.03,-15.72 -429.53,-23.22 Q2F.2 -314.95,-78.75 -214.95,-178.75 Q1F.1@-143.31,-178.75
NetQ1F_2: Q1F.2 Q2F.3 R5F.1 | length 448.6
  Bottom Layer w15: Q2F.3 -293.31,21.25 -193.31,-78.75 -118.1,-78.75 -59.05,-137.8 R5F.1
NetQ1G_1: Q1G.1 Q2G.2 R6G.2 | length 687.9
  Bottom Layer w15: R6G.2 196.85,196.85 118.11,118.11 98.43,118.11 35.41,55.09 35.41,-15.72 42.91,-23.22 Q2G.2 157.49,-78.75 257.49,-178.75 Q1G.1
NetQ1G_2: Q1G.2 Q2G.3 R5G.1 | length 448.6
  Bottom Layer w15: Q2G.3 179.13,21.25 Q1G.2 354.34,-78.75 413.39,-137.8 R5G.1
NetQ1H_1: Q1H.1 Q2H.2 R6H.2 | length 687.9
  Bottom Layer w15: R6H.2 669.29,196.85 590.55,118.11 570.87,118.11 507.85,55.09 507.85,-15.72 515.35,-23.22 Q2H.2 629.93,-78.75 729.93,-178.75 Q1H.1
NetQ1H_2: Q1H.2 Q2H.3 R5H.1 | length 448.6
  Bottom Layer w15: Q2H.3 651.57,21.25 Q1H.2 826.78,-78.75 885.83,-137.8 R5H.1
NetQ1I_1: Q1I.1 Q2I.2 R6I.2 | length 687.9
  Bottom Layer w15: R6I.2 1141.73,196.85 1062.99,118.11 1043.31,118.11 980.29,55.09 980.29,-15.72 987.79,-23.22 987.79,-78.75 1102.37,-78.75 1202.37,-178.75 Q1I.1
NetQ1I_2: Q1I.2 Q2I.3 R5I.1 | length 448.6
  Bottom Layer w15: Q2I.3@1037.79,21.25 1124.01,21.25 Q1I.2 1299.22,-78.75 1358.27,-137.8 R5I.1
NetQ1J_1: Q1J.1 Q2J.2 R6J.2 | length 687.9
  Bottom Layer w15: R6J.2 1614.17,196.85 1535.43,118.11 1515.75,118.11 1452.73,55.09 1452.73,-15.72 1460.23,-23.22 Q2J.2 1574.81,-78.75 1674.81,-178.75 Q1J.1
NetQ1J_2: Q1J.2 Q2J.3 R5J.1 | length 448.6
  Bottom Layer w15: Q2J.3 1596.45,21.25 Q1J.2 1771.66,-78.75 1830.71,-137.8 R5J.1
NetQ1K_1: Q1K.1 Q2K.2 R6K.2 | length 687.9
  Bottom Layer w15: R6K.2 2086.61,196.85 2007.87,118.11 1988.19,118.11 1925.17,55.09 1925.17,-15.72 1932.67,-23.22 Q2K.2 2047.25,-78.75 2147.25,-178.75 Q1K.1
NetQ1K_2: Q1K.2 Q2K.3 R5K.1 | length 448.6
  Bottom Layer w15: Q2K.3 2068.89,21.25 Q1K.2 2244.1,-78.75 2303.15,-137.8 R5K.1
NetQ1L_1: Q1L.1 Q2L.2 R6L.2 | length 687.9
  Bottom Layer w15: R6L.2 2559.06,196.85 2480.32,118.11 2460.63,118.11 2397.61,55.09 2397.61,-15.72 2405.11,-23.22 Q2L.2 2519.69,-78.75 2619.69,-178.75 Q1L.1
NetQ1L_2: Q1L.2 Q2L.3 R5L.1 | length 448.6
  Bottom Layer w15: Q2L.3 2541.33,21.25 Q1L.2 2716.54,-78.75 2775.59,-137.8 R5L.1
NetR1_1: R1.1 U1.1 U1.2
NetR2_1: R2.1 U1.8
NetU1_3: U1.3 U1.5 U1.13
PWM: RV1.2 TP2.1 U1.6 U1.9 U1.10 U1.12
TEST: TP3.1 U1.11
VCC: C2.2 C4.2 D1.2 D3.2 FUSE2.2 LINK1.2 R2.2 R4.1 U1.7 U1.14
pads on no net: P1.H1 P1.H2 P1.H3

## Polygon pours and split planes (outlines as drawn)
GND on Bottom Layer "Bottom Layer-No Net" (solid, shelved, pour order 2): -3075.88,-1102.36 -3075.88,1102.36 cw(c-2913.39,1102.36) -2913.39,1264.86 2913.39,1264.86 cw(c2913.39,1102.36) 3075.88,1102.36 3075.88,-1102.36 cw(c2913.39,-1102.36) 2913.39,-1264.86 -2913.39,-1264.86 cw(c-2913.39,-1102.36)

## Silkscreen, mask and mechanical layers (free items; w line width, h text height)
Top Overlay:
  drawing of 182 lines, arcs and shapes, not listed
Mechanical 1:
  lines w10: -3070.87,39.37 -3070.87,1102.36 cw(c-2913.39,1102.36) -2913.39,1259.84 0,1259.84 2913.39,1259.84 cw(c2913.39,1102.36) 3070.87,1102.36 3070.87,39.37 ; -3070.87,157.48 -3070.87,-1102.36 ccw(c-2913.39,-1102.36) -2913.39,-1259.84 0,-1259.84 2913.39,-1259.84 ccw(c2913.39,-1102.36) 3070.87,-1102.36 3070.87,157.48